# Altium PCB QuardnoShield_0_3.PcbDoc
Units mm, origin at the board's own origin, x right, y up, seen from the top; angles counter-clockwise.
Board outline 50 x 50 mm, 2 copper layers (Top Layer, Bottom Layer); 19 components, 33 nets, 84 pads, 10 vias.
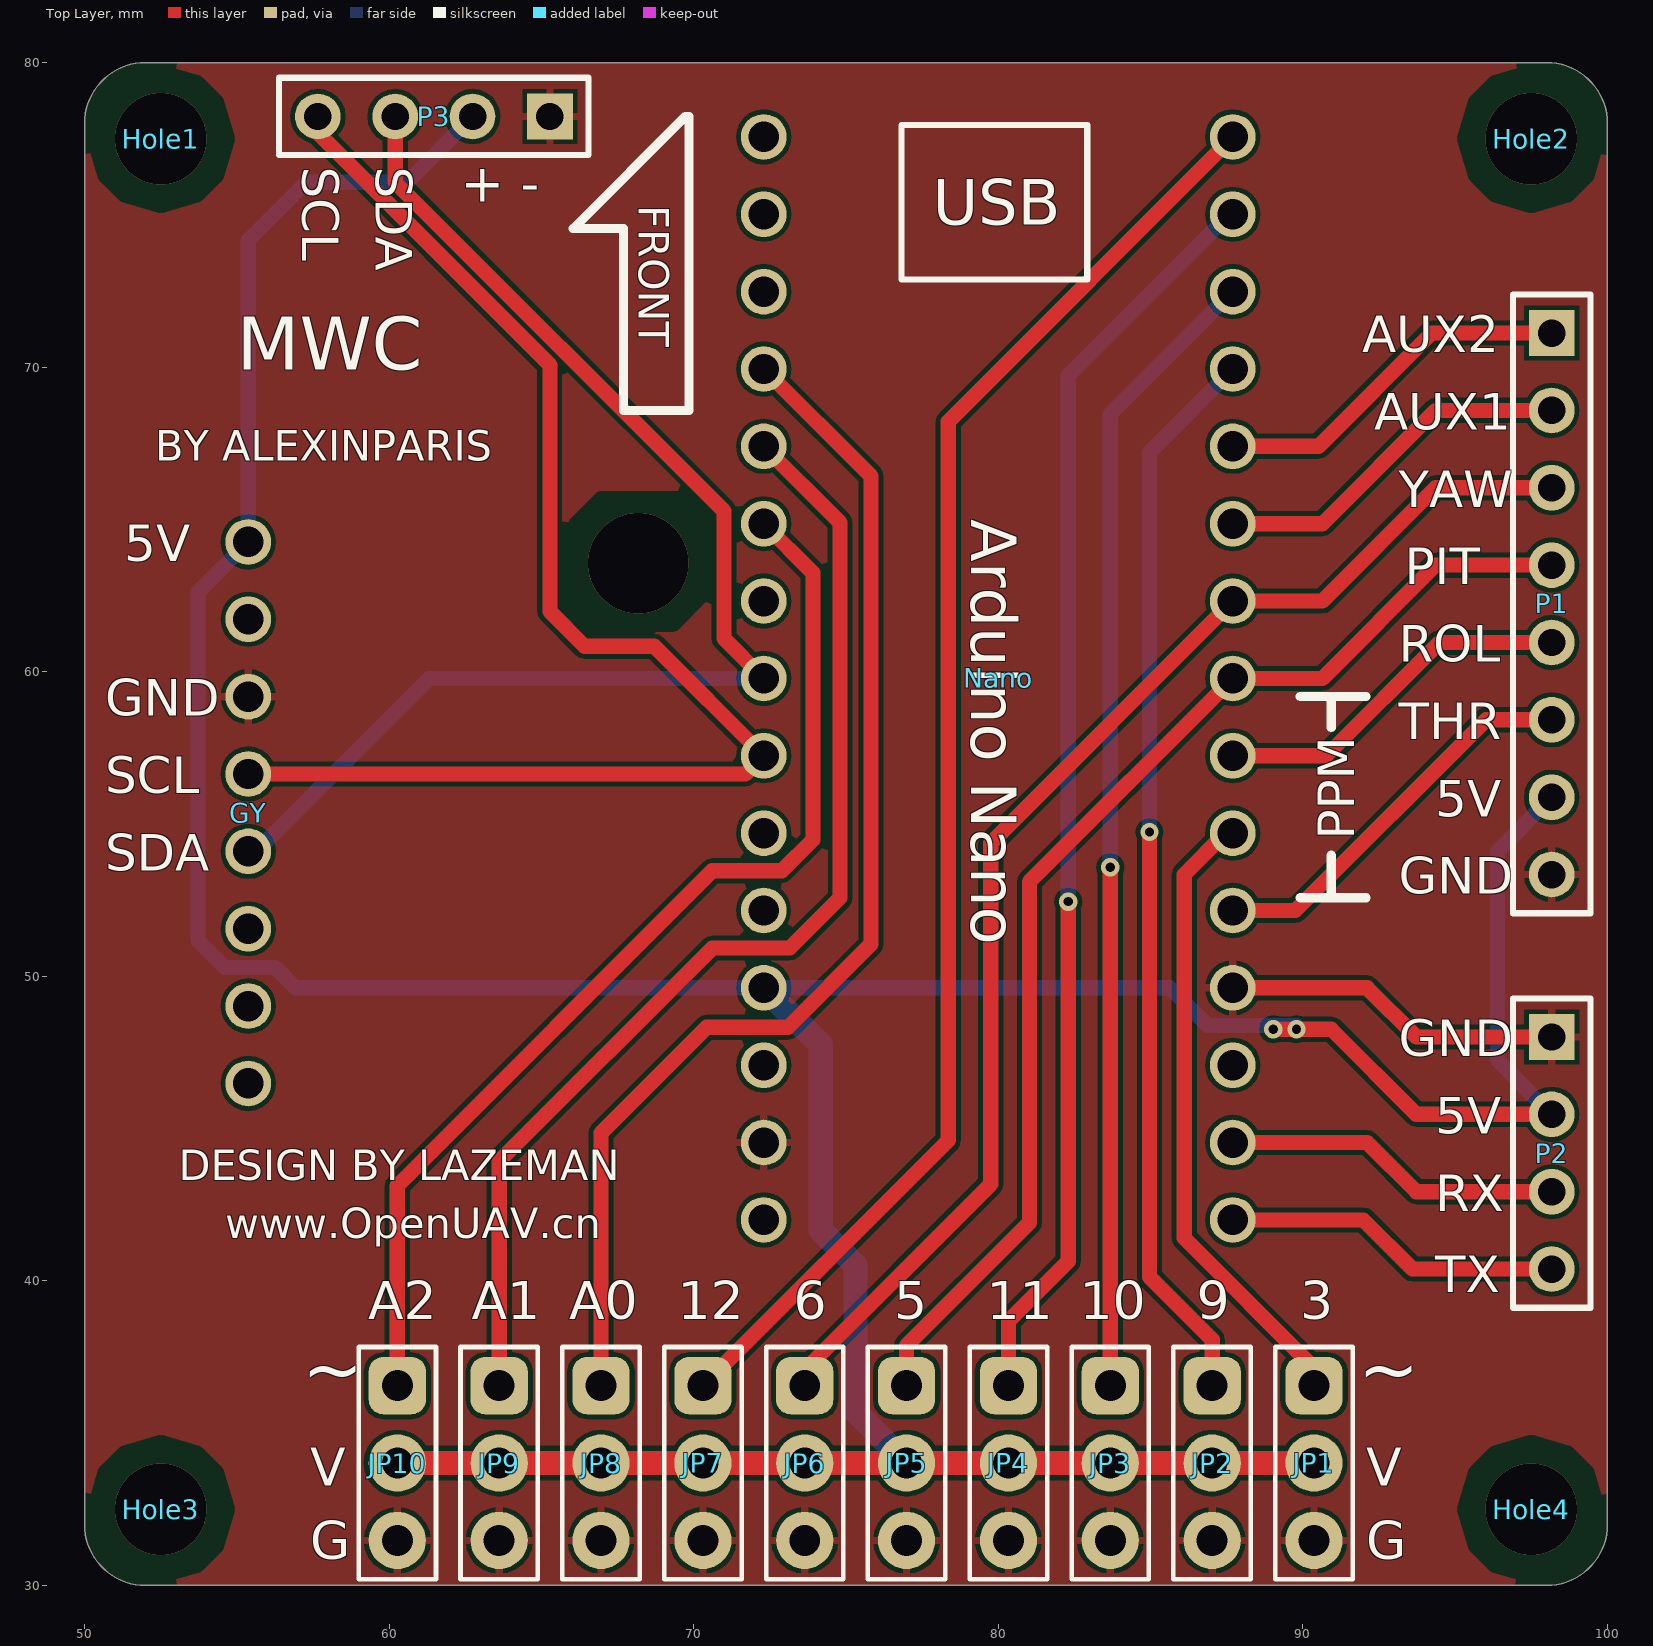
[diagram p0: Top Layer view]
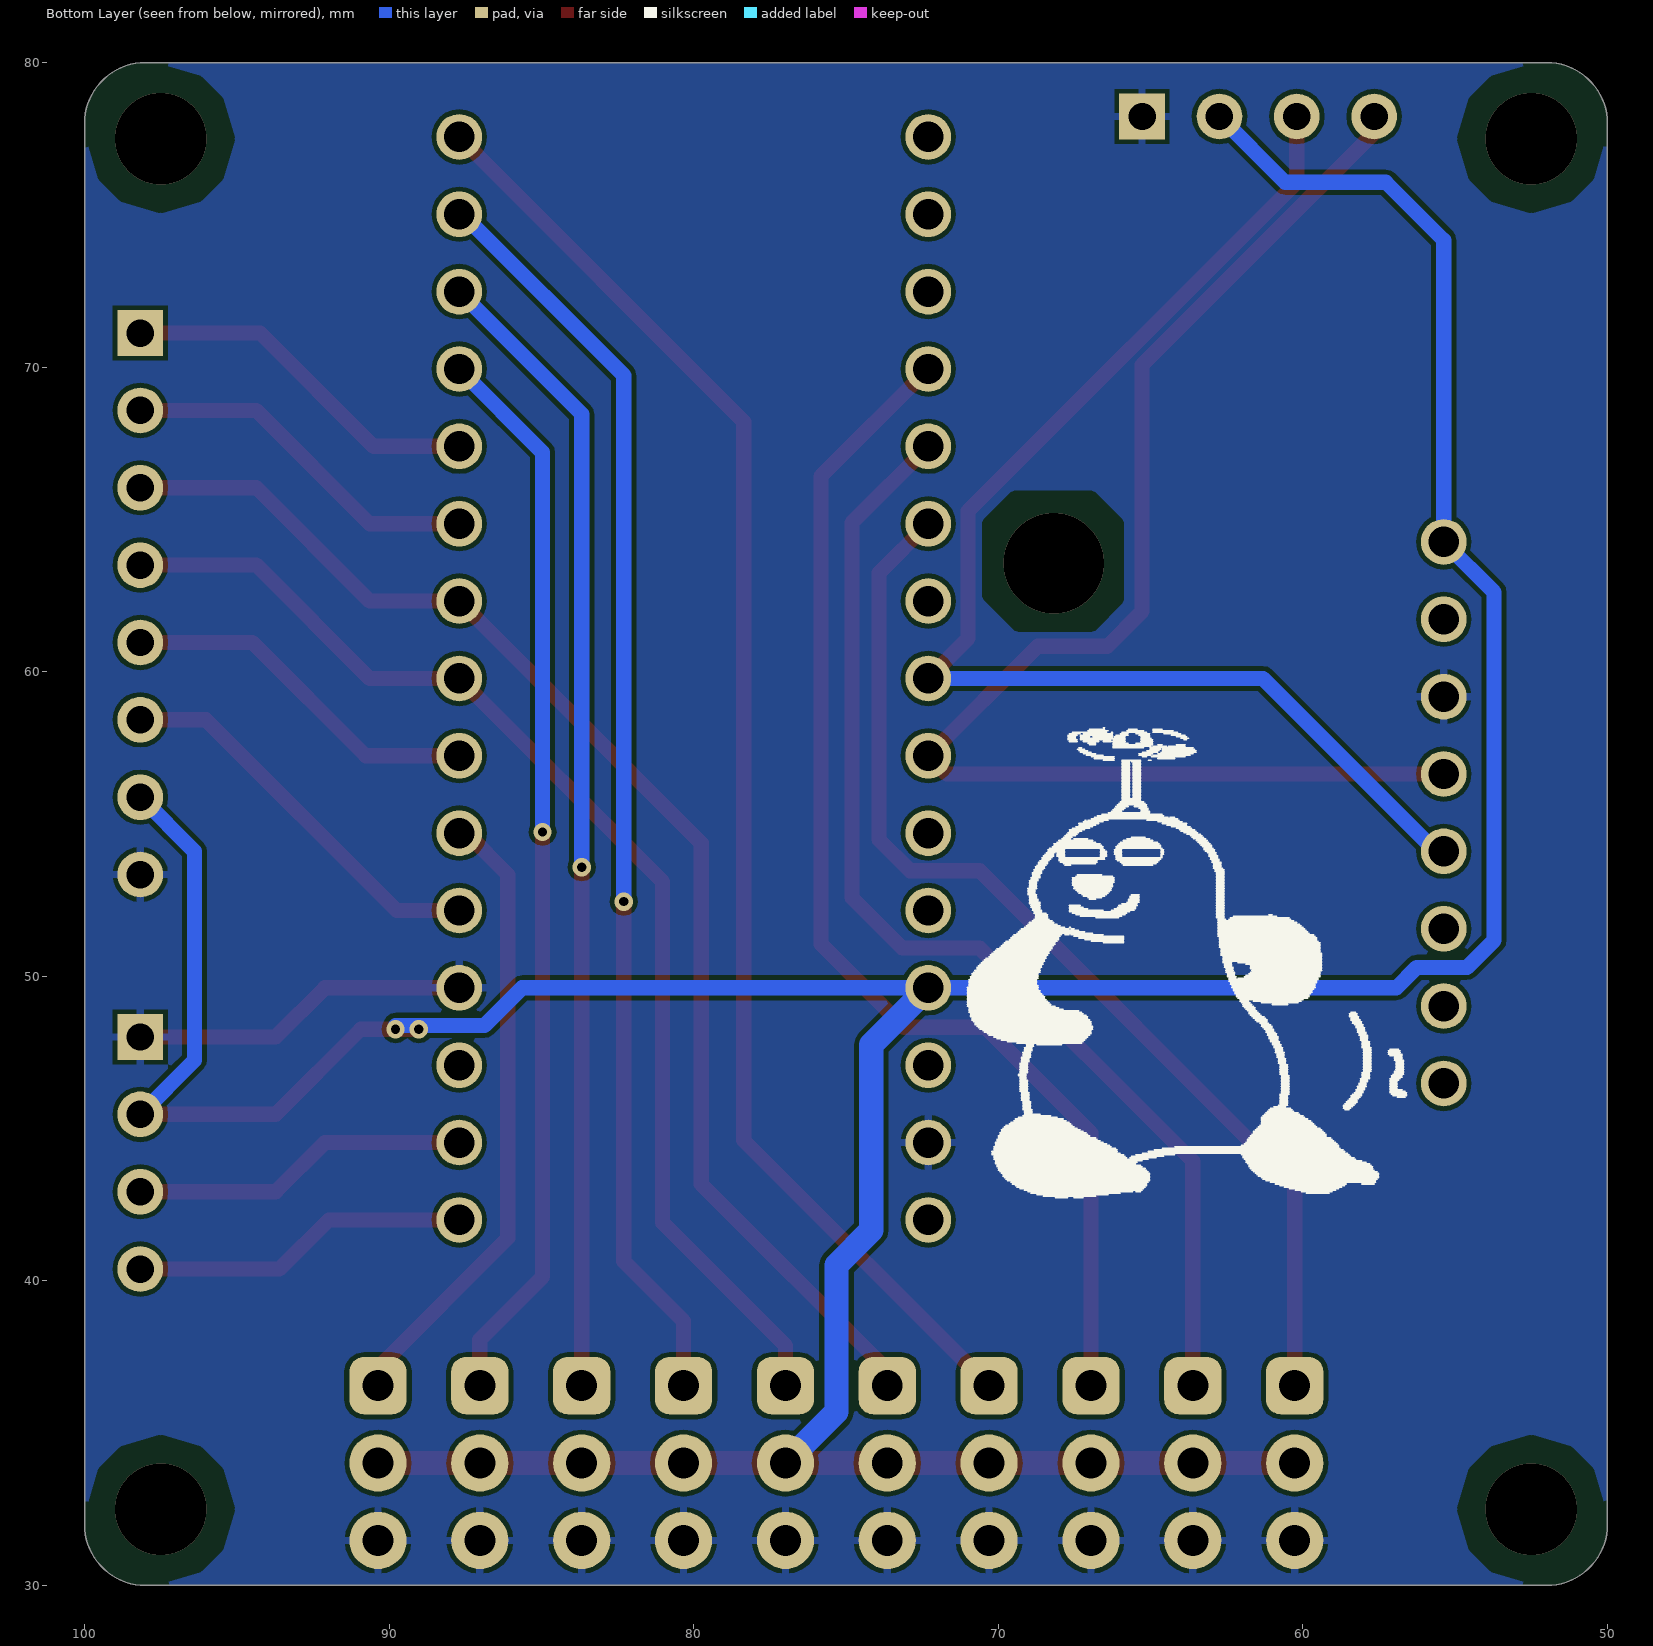
[diagram p1: Bottom Layer view, seen from below]

## Layer stack, top to bottom
Top Layer: signal copper 0.0356
Dielectric: dielectric 0.32, FR-4, Dk 4.8
Bottom Layer: signal copper 0.0356

## Board outline
50,32 50,78 cw(c52,78) 52,80 98,80 cw(c98,78) 100,78 100,32 cw(c98,32) 98,30 52,30 cw(c52,32)

## Design rules (kind name [scope] priority, off if disabled: settings)
Clearance [All] p1: gap=0.15
HoleSize [All] p1: absolutevalues=TRUE maxlimit=3 minlimit=0.15 maxpercent=80.000 minpercent=20.000
MinimumSolderMaskSliver [All] p1: minsoldermaskwidth=0
PolygonConnect [All] p1: connectstyle=Relief reliefconductorwidth=0.254 reliefentries=4 polygonreliefangle="90 Angle"
RoomDefinition QuardnoShield_0_1 [InComponentClass('QuardnoShield_0_1')] p1: confinementstyle=ConfineOut formatcopy=TRUE lockcomponents=FALSE outline 101.092,31.496 146.431,31.496 146.431,42.164 101.092,42.164
RoutingVias [All] p1: holewidth=0.711 width=1.27 viastyle="Through Hole" minholewidth=0.711 minwidth=1.27 maxholewidth=0.711 maxwidth=1.27
SilkToSilkClearance [All] p1: silktosilkclearance=0
SilkscreenOverComponentPads [All] p1: minsilkscreentomaskgap=0
SolderMaskExpansion [All] p1: expansion=0.102
Width [All] p1: maxlimit=1 minlimit=0.15 preferedwidth=0.5
24 further rules are at their usual default settings.

## Components (designator, comment, footprint, x,y, rotation, side; value= is the part's Value field where it differs from the comment)
GY "GY-87" GY-87 55.372,64.262 r0 top
Hole1 "3mmHole" 3mmHoleSmall 52.5,77.5 r0 top
Hole2 "3mmHole" 3mmHoleSmall 97.5,77.5 r90 top
Hole3 "3mmHole" 3mmHoleSmall 52.5,32.5 r90 top
Hole4 "3mmHole" 3mmHoleSmall 97.5,32.5 r90 top
JP1 "Servo out 1" JP 90.297,34.036 r270 top
JP2 "Servo out 1" JP 86.953,34.036 r270 top
JP3 "Servo out 1" JP 83.608,34.036 r270 top
JP4 "Servo out 1" JP 80.264,34.036 r270 top
JP5 "Servo out 1" JP 76.92,34.036 r270 top
JP6 "Servo out 1" JP 73.575,34.036 r270 top
JP7 "Servo out 1" JP 70.231,34.036 r270 top
JP8 "Servo out 1" JP 66.887,34.036 r270 top
JP9 "Servo out 1" JP 63.542,34.036 r270 top
JP10 "Servo out 1" JP 60.198,34.036 r270 top
Nano "ArduinoNano" NanoBase 80,57 r180 top
P1 "Receiver" HDR1X8 98.171,71.12 r270 top
P2 "Serial Port" HDR1X4 98.171,48.006 r270 top
P3 "I2C" HDR1X4 65.278,78.232 r180 top

## Footprints (in the part's own frame and the unit in brackets; to place one, negate y for a bottom-side part, rotate by r counter-clockwise, add the part's x,y. Pads: shape width x height; smd on the part's side, far side on the other; paste and mask are expansions set on the pad)
3mmHoleSmall [mm]
  Top Layer pour cut-out: -1.27,1.905 0,2.286 1.27,1.905 1.905,1.27 2.286,0 1.905,-1.27 1.27,-1.905 0,-2.286 -1.27,-1.905 -1.905,-1.27 -2.286,0 -1.905,1.27
  Bottom Layer pour cut-out: -1.27,1.905 0,2.286 1.27,1.905 1.905,1.27 2.286,0 1.905,-1.27 1.27,-1.905 0,-2.286 -1.27,-1.905 -1.905,-1.27 -2.286,0 -1.905,1.27
GY-87 [mm]
  round 1.5 hole 1: 1(0,0) 2(0,-2.54) 3(0,-5.08) 4(0,-7.62) 5(0,-10.16) 6(0,-12.7) 7(0,-15.24) 8(0,-17.78)
  Top Layer pour cut-out: 14.097,1.524 14.986,0.635 14.986,-1.778 13.97,-2.794 11.557,-2.794 10.668,-1.905 10.668,0.635 11.557,1.524
  Bottom Layer pour cut-out: 11.557,1.524 14.097,1.524 14.986,0.635 14.986,-1.778 13.97,-2.794 11.557,-2.794 10.668,-1.905 10.668,0.635
HDR1X4 [mm] "Connector; Header; 4 Position"
  rect 1.5x1.5 hole 0.9: 1(0,0)
  round 1.5 hole 0.9: 2(2.54,0) 3(5.08,0) 4(7.62,0)
  silkscreen extent -1.27,-1.27 8.89,1.27
HDR1X8 [mm] "Connector; Header; 8 Position"
  rect 1.5x1.5 hole 0.9: 1(0,0)
  round 1.5 hole 0.9: 2(2.54,0) 3(5.08,0) 4(7.62,0) 5(10.16,0) 6(12.7,0) 7(15.24,0) 8(17.78,0)
  silkscreen extent -1.27,-1.27 19.05,1.27
JP [mil]
  rrect50% 74x74 hole 40: 1(-99.27,2.73)
  round 74 hole 40: 2(0.73,2.73) 3(100.73,2.73)
  silkscreen extent -149,-47 151,53, body extent -147,-45 149,50, height 394
NanoBase [mm]
  round 1.5 hole 1: 1(-7.7,15) 2(-7.7,12.46) 3(-7.7,9.92) 4(-7.7,7.38) 5(-7.7,4.84) 6(-7.7,2.3) 7(-7.7,-0.24) 8(-7.7,-2.78) 9(-7.7,-5.32) 10(-7.7,-7.86) 11(-7.7,-10.4) 12(-7.7,-12.94) 13(-7.7,-15.48) 14(-7.7,-18.02) 15(-7.7,-20.56) 16(7.7,-20.56) 17(7.7,-18.02) 18(7.7,-15.48) 19(7.7,-12.94) 20(7.7,-10.4) 21(7.7,-7.86) 22(7.7,-5.32) 23(7.7,-2.78) 24(7.7,-0.24) 25(7.7,2.3) 26(7.7,4.84) 27(7.7,7.38) 28(7.7,9.92) 29(7.7,12.46) 30(7.7,15)
  silkscreen extent -2.92,-20.95 3.18,-15.88

## Part data
JP1 JP2 JP3 JP4 JP5 JP6 JP7 JP8 JP9 JP10: library part "Hdr 3 Pin 0.1", "Header, 3-Pin, 0.1\""
P1: library part "Header 8", "Header, 8-Pin"
P2 P3: library part "Header 4", "Header, 4-Pin"

## Via types
v1: diameter 0.6, hole 0.3, Top Layer to Bottom Layer, tented both sides, 5 vias
v2: diameter 3, hole 3, Top Layer to Bottom Layer, 4 vias
v3: diameter 3.3, hole 3.3, Top Layer to Bottom Layer, 1 vias

## Nets (pads, with @x,y where several pads share a name; then routed paths per layer and width w, separated by ;. In a path a pad name is that pad's centre, name@x,y a point inside that pad or via, vN(x,y) a via of type N, cw(c..) or ccw(c..) an arc to the next point about the centre after c; other vN are vias at no path point)
3V3: Nano.17
3V3-GY: GY.2
A0: JP8.1 Nano.19 | length 40.1
  Top Layer w0.5: JP8.1 66.956,44.858 70.421,48.323 73.088,48.323 75.819,51.054 75.819,66.421 Nano.19
A1: JP9.1 Nano.20 | length 38
  Top Layer w0.5: JP9.1 63.612,43.927 70.612,50.927 73.152,50.927 74.803,52.578 74.803,64.897 Nano.20
A2: JP10.1 Nano.21 | length 36
  Top Layer w0.5: JP10.1 60.267,43.122 70.612,53.467 72.898,53.467 73.914,54.483 73.914,63.246 Nano.21
A3: Nano.22
A4: GY.5 Nano.23 P3.3 | length 42.7
  Top Layer w0.5: P3.3 60.198,76.073 70.993,65.278 70.993,61.087 Nano.23
  Bottom Layer w0.5: GY.5 55.626,54.102 61.304,59.78 Nano.23
A5: GY.4 Nano.24 P3.4 | length 45.6
  Top Layer w0.5: GY.4 71.702,56.642 Nano.24 68.707,60.833 66.421,60.833 65.278,61.976 65.278,70.074 57.658,77.694 P3.4
A6: Nano.25
A7: Nano.26
AREF: Nano.18
D0: Nano.2 P2.3 | length 11.1
  Top Layer w0.5: Nano.2 92.112,44.54 93.726,42.926 P2.3
D1: Nano.1 P2.4 | length 11.1
  Top Layer w0.5: Nano.1 91.985,42 93.599,40.386 P2.4
D2: Nano.5 P1.6 | length 13.1
  Top Layer w0.5: Nano.5 89.752,52.16 96.012,58.42 P1.6
D3: JP1.1 Nano.6 | length 20.7
  Top Layer w0.5: Nano.6 87.466,54.7 86.106,53.34 86.106,41.402 90.366,37.142 JP1.1
D4: Nano.7 P1.5 | length 12
  Top Layer w0.5: Nano.7 90.768,57.24 94.488,60.96 P1.5
D5: JP5.1 Nano.8 P1.4 | length 39.7
  Top Layer w0.5: JP5.1 76.989,37.873 81.026,41.91 81.026,53.106 Nano.8 90.641,59.78 94.361,63.5 P1.4
D6: JP6.1 Nano.9 P1.3 | length 43.6
  Top Layer w0.5: JP6.1 73.645,37.069 79.756,43.18 79.756,54.376 Nano.9 90.641,62.32 94.361,66.04 P1.3
D7: Nano.10 P1.2 | length 12
  Top Layer w0.5: Nano.10 90.641,64.86 94.361,68.58 P1.2
D8: Nano.11 P1.1 | length 12
  Top Layer w0.5: Nano.11 90.514,67.4 94.234,71.12 P1.1
D9: JP2.1 Nano.12 | length 35.4
  Top Layer w0.5: v1(84.963,54.737) 84.963,40.132 87.022,38.073 JP2.1
  Bottom Layer w0.5: v1(84.963,54.737) 84.963,67.203 Nano.12
D10: JP3.1 Nano.13 | length 37.6
  Top Layer w0.5: JP3.1 v1(83.678,53.579) v1@83.685,53.586
  Bottom Layer w0.5: v1(83.678,53.579) 83.678,68.458 Nano.13
D11: JP4.1 Nano.14 | length 41.6
  Top Layer w0.5: JP4.1 80.333,38.677 82.296,40.64 v1(82.296,52.451)
  Bottom Layer w0.5: v1(82.296,52.451) 82.296,69.723 87.593,75.02 Nano.14
D12: JP7.1 Nano.15 | length 48.2
  Top Layer w0.5: JP7.1 78.359,44.616 78.359,68.219 Nano.15
D13: Nano.16
DADY: GY.8
FSYNC: GY.6
GND: GY.3 JP1.3 JP2.3 JP3.3 JP4.3 JP5.3 JP6.3 JP7.3 JP8.3 JP9.3 JP10.3 Nano.4 Nano.29 P1.8 P2.1 P3.1 | length 11.1
  Top Layer w0.5: Nano.4 92.112,49.62 93.726,48.006 P2.1
INTA: GY.7
RST: Nano.28
RST2: Nano.3
VCC: GY.1 JP1.2 JP2.2 JP3.2 JP4.2 JP5.2 JP6.2 JP7.2 JP8.2 JP9.2 JP10.2 Nano.27 P1.7 P2.2 P3.2 | length 139.8
  Top Layer w0.3: JP3.2 JP3.2@83.966,34.017
  Top Layer w0.5: v1(89.027,48.26) v1(89.789,48.26) 90.932,48.26 93.726,45.466 P2.2
  Top Layer w0.8: JP10.2 JP9.2 JP8.2 JP7.2 JP6.2 JP5.2 JP4.2 JP3.2 ; JP3.2@83.966,34.017 JP2.2 JP1.2
  Bottom Layer w0.5: P3.2 60.579,76.073 57.277,76.073 55.372,74.168 GY.1 53.721,62.611 53.721,51.181 54.61,50.292 56.261,50.292 56.933,49.62 Nano.27 85.635,49.62 86.868,48.387 v1@89.789,48.387 ; P2.2 96.393,47.244 96.393,54.102 P1.7
  Bottom Layer w0.8: Nano.27 74.168,47.752 74.168,41.656 75.311,40.513 75.311,35.695 JP5.2
VIN: Nano.30
copper on no net:
  other v2: 52.5,32.5 97.5,32.5 52.5,77.5 97.5,77.5
  other v3: 68.172,63.562

## Polygon pours and split planes (outlines as drawn)
GND on Top Layer "Top Layer-No Net" (solid): 50,32 50,78 cw(c52,78) 52,80 98,80 cw(c98,78) 100,78 100,32 cw(c98,32) 98,30 52,30 cw(c52,32)
GND on Bottom Layer "Top Layer-No Net1" (solid): 50,32 50,78 cw(c52,78) 52,80 98,80 cw(c98,78) 100,78 100,32 cw(c98,32) 98,30 52,30 cw(c52,32)

## Silkscreen, mask and mechanical layers (free items; w line width, h text height)
Top Overlay:
  lines w0.3: 66.548,74.549 67.691,74.549 67.691,68.58 69.85,68.58 69.85,78.232 69.723,78.232 66.04,74.549 66.675,74.549 ; 89.916,52.578 92.075,52.578 ; 89.916,59.182 92.075,59.182 ; 90.932,52.642 90.932,53.975 ; 90.932,58.166 90.932,58.42 ; 90.932,58.293 90.932,59.118
  text "SCL" at 57.15,76.581 h1.2 r270
  text "SDA" at 59.563,76.581 h1.2 r270
  text "+ -" at 62.357,75.438 h1.25
  text "FRONT" at 68.199,75.311 h1 r270
  text "AUX2" at 91.948,70.485 h1.2
  text "MWC" at 54.991,69.342 h3
  text "AUX1" at 92.348,67.945 h1.2
  text "BY ALEXINPARIS" at 52.324,66.929 h1
  text "YAW" at 93.148,65.405 h1.2
  text "5V" at 51.308,63.627 h1.2
  text "PIT" at 93.348,62.865 h1.2
  text "ROL" at 93.148,60.325 h1.2
  text "GND" at 50.673,58.547 h1.2
  text "THR" at 93.148,57.785 h1.2
  text "SCL" at 50.673,56.007 h1.2
  text "5V" at 94.347,55.245 h1.2
  text "PPM" at 91.694,54.483 h1.2 r90
  text "SDA" at 50.673,53.467 h1.2
  text "GND" at 93.148,52.705 h1.2
  text "GND" at 93.148,47.371 h1.2
  text "5V" at 94.347,44.831 h1.2
  text "DESIGN BY LAZEMAN" at 53.086,43.307 h1
  text "RX" at 94.347,42.291 h1.2
  text "www.OpenUAV.cn" at 54.61,41.402 h1
  text "TX" at 94.347,39.624 h1.2
  text "A2" at 59.309,38.735 h1.25
  text "A1" at 62.71,38.735 h1.25
  text "A0" at 65.913,38.735 h1.25
  text "12" at 69.469,38.735 h1.25
  text "6" at 73.279,38.735 h1.25
  text "5" at 76.581,38.735 h1.25
  text "11" at 79.629,38.735 h1.25
  text "10" at 82.677,38.735 h1.25
  text "9" at 86.515,38.735 h1.25
  text "3" at 89.916,38.735 h1.25
  text "~" at 57.15,35.687 h3
  text "~" at 91.821,35.687 h3
  text "V" at 57.404,33.274 h1.25
  text "V" at 92.075,33.274 h1.25
  text "G" at 57.404,30.861 h1.25
  text "G" at 92.075,30.861 h1.25
Bottom Overlay:
  drawing of 838 lines, arcs and shapes, not listed
Mechanical 1:
  the board outline again, w0.3

## Text inside footprints (layer, text, board x,y; h text height)
Nano: Top Overlay "Arduino Nano" at 79.111,65.001 h1.5 r270; Top Overlay "USB" at 77.851,74.676 h1.5